# Altium PCB SIM7600CE.PcbDoc
Units mil, origin at the board's own origin, x right, y up, seen from the top; angles counter-clockwise.
Board outline 6000 x 4000 mil, 2 copper layers (Top Layer, Bottom Layer); 1 components, 0 nets, 87 pads, 0 vias.
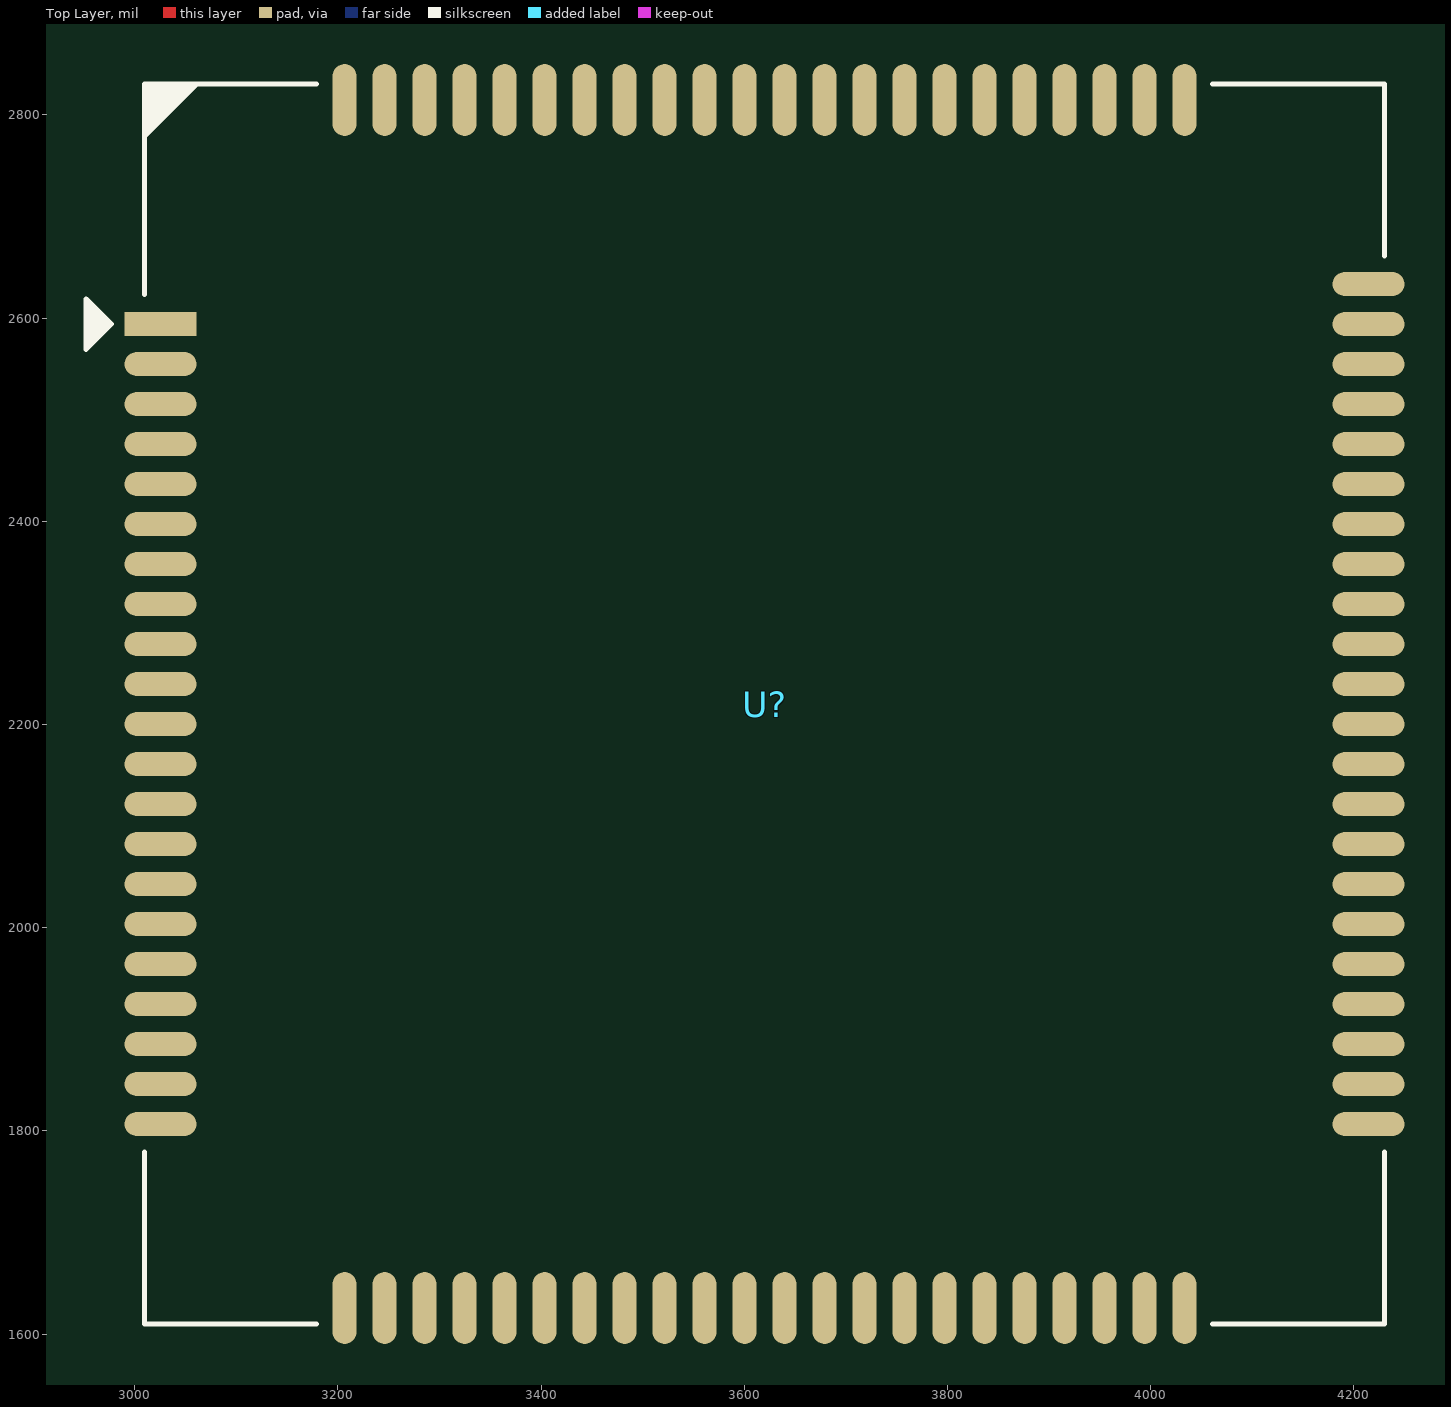
[diagram p0: Top Layer view]
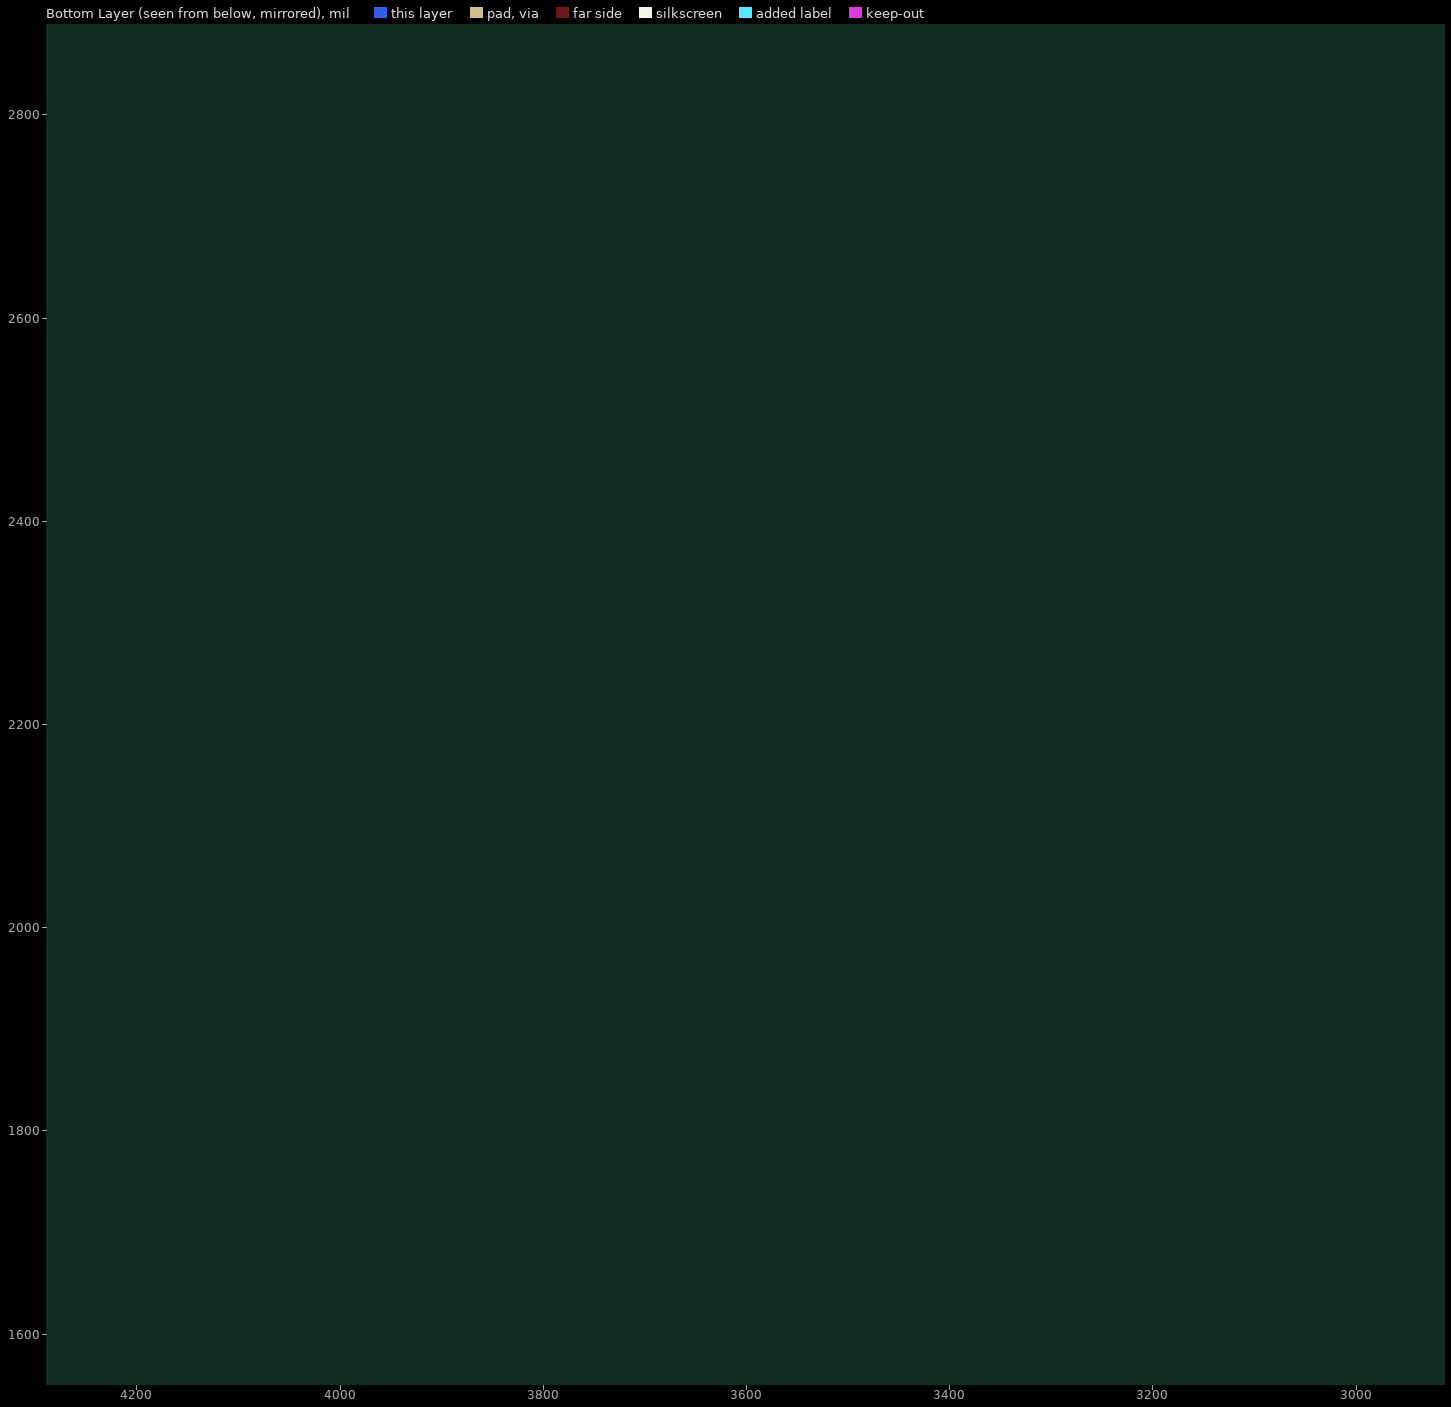
[diagram p1: Bottom Layer view, seen from below]

## Layer stack, top to bottom
Top Layer: signal copper 1.4
Dielectric: dielectric 12.6, FR-4, Dk 4.8
Bottom Layer: signal copper 1.4

## Board outline
1000,1000 7000,1000 7000,5000 1000,5000

## Design rules (kind name [scope] priority, off if disabled: settings)
Clearance [All] p1: gap=10
PolygonConnect [All] p1: connectstyle=Relief reliefconductorwidth=10 reliefentries=4 polygonreliefangle="90 Angle"
RoutingVias [All] p1: holewidth=28 width=50 viastyle="Through Hole" minholewidth=28 minwidth=50 maxholewidth=28 maxwidth=50
SilkscreenOverComponentPads [All] p1: minsilkscreentomaskgap=10
SolderMaskExpansion [All] p1: expansion=4
Width [All] p1: maxlimit=10 minlimit=10 preferedwidth=10
27 further rules are at their usual default settings.

## Components (designator, comment, footprint, x,y, rotation, side; value= is the part's Value field where it differs from the comment)
U? "SIM7600CE" LQFP87 3620,2220 r0 top (schematic designator U14)

## Footprints (in the part's own frame and the unit in brackets; to place one, negate y for a bottom-side part, rotate by r counter-clockwise, add the part's x,y. Pads: shape width x height; smd on the part's side, far side on the other; paste and mask are expansions set on the pad)
LQFP87 [mm]
  rect 1.8x0.6 smd: 1(-15.1,9.5)
  oval 1.8x0.6 smd: 2(-15.1,8.5) 3(-15.1,7.5) 4(-15.1,6.5) 5(-15.1,5.5) 6(-15.1,4.5) 7(-15.1,3.5) 8(-15.1,2.5) 9(-15.1,1.5) 10(-15.1,0.5) 11(-15.1,-0.5) 12(-15.1,-1.5) 13(-15.1,-2.5) 14(-15.1,-3.5) 15(-15.1,-4.5) 16(-15.1,-5.5) 17(-15.1,-6.5) 18(-15.1,-7.5) 19(-15.1,-8.5) 20(-15.1,-9.5) 41(15.1,-9.5) 42(15.1,-8.5) 43(15.1,-7.5) 44(15.1,-6.5) 45(15.1,-5.5) 46(15.1,-4.5) 47(15.1,-3.5) 48(15.1,-2.5) 49(15.1,-1.5) 50(15.1,-0.5) 51(15.1,0.5) 52(15.1,1.5) 53(15.1,2.5) 54(15.1,3.5) 55(15.1,4.5) 56(15.1,5.5) 57(15.1,6.5) 58(15.1,7.5) 59(15.1,8.5) 60(15.1,9.5) 81(-15.1,-10.5) 82(15.1,-10.5) 85(15.1,10.5)
  oval 0.6x1.8 smd: 21(-9.5,-15.1) 22(-8.5,-15.1) 23(-7.5,-15.1) 24(-6.5,-15.1) 25(-5.5,-15.1) 26(-4.5,-15.1) 27(-3.5,-15.1) 28(-2.5,-15.1) 29(-1.5,-15.1) 30(-0.5,-15.1) 31(0.5,-15.1) 32(1.5,-15.1) 33(2.5,-15.1) 34(3.5,-15.1) 35(4.5,-15.1) 36(5.5,-15.1) 37(6.5,-15.1) 38(7.5,-15.1) 39(8.5,-15.1) 40(9.5,-15.1) 61(9.5,15.1) 62(8.5,15.1) 63(7.5,15.1) 64(6.5,15.1) 65(5.5,15.1) 66(4.5,15.1) 67(3.5,15.1) 68(2.5,15.1) 69(1.5,15.1) 70(0.5,15.1) 71(-0.5,15.1) 72(-1.5,15.1) 73(-2.5,15.1) 74(-3.5,15.1) 75(-4.5,15.1) 76(-5.5,15.1) 77(-6.5,15.1) 78(-7.5,15.1) 79(-8.5,15.1) 80(-9.5,15.1) 83(10.5,-15.1) 84(-10.5,-15.1) 86(-10.5,15.1) 87(10.5,15.1)
  silkscreen extent -16.96,-15.5 15.5,15.5

## Part data
U?: library part 4G模块, "中国全网通"

## Nets (pads, with @x,y where several pads share a name; then routed paths per layer and width w, separated by ;. In a path a pad name is that pad's centre, name@x,y a point inside that pad or via, vN(x,y) a via of type N, cw(c..) or ccw(c..) an arc to the next point about the centre after c; other vN are vias at no path point)
pads on no net: U?.1 U?.2 U?.3 U?.4 U?.5 U?.6 U?.7 U?.8 U?.9 U?.10 U?.11 U?.12 U?.13 U?.14 U?.15 U?.16 U?.17 U?.18 U?.19 U?.20 U?.21 U?.22 U?.23 U?.24 U?.25 U?.26 U?.27 U?.28 U?.29 U?.30 U?.31 U?.32 U?.33 U?.34 U?.35 U?.36 U?.37 U?.38 U?.39 U?.40 U?.41 U?.42 U?.43 U?.44 U?.45 U?.46 U?.47 U?.48 U?.49 U?.50 U?.51 U?.52 U?.53 U?.54 U?.55 U?.56 U?.57 U?.58 U?.59 U?.60 U?.61 U?.62 U?.63 U?.64 U?.65 U?.66 U?.67 U?.68 U?.69 U?.70 U?.71 U?.72 U?.73 U?.74 U?.75 U?.76 U?.77 U?.78 U?.79 U?.80 U?.81 U?.82 U?.83 U?.84 U?.85 U?.86 U?.87